# EAGLE board OrmerodController (EAGLE 7.2.0)
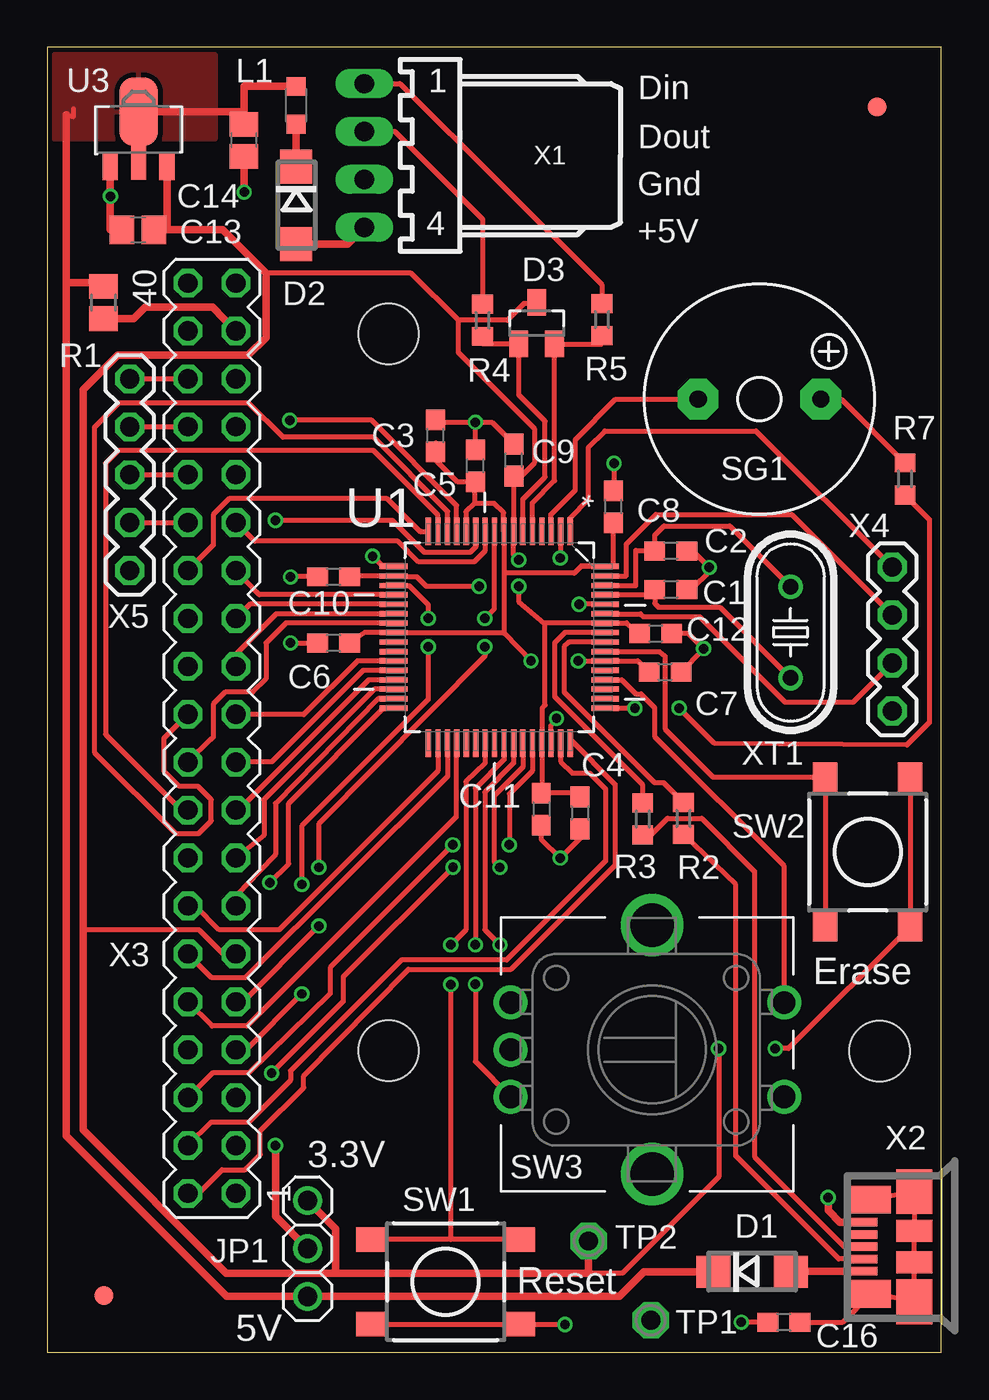
[diagram p0: board, top side]
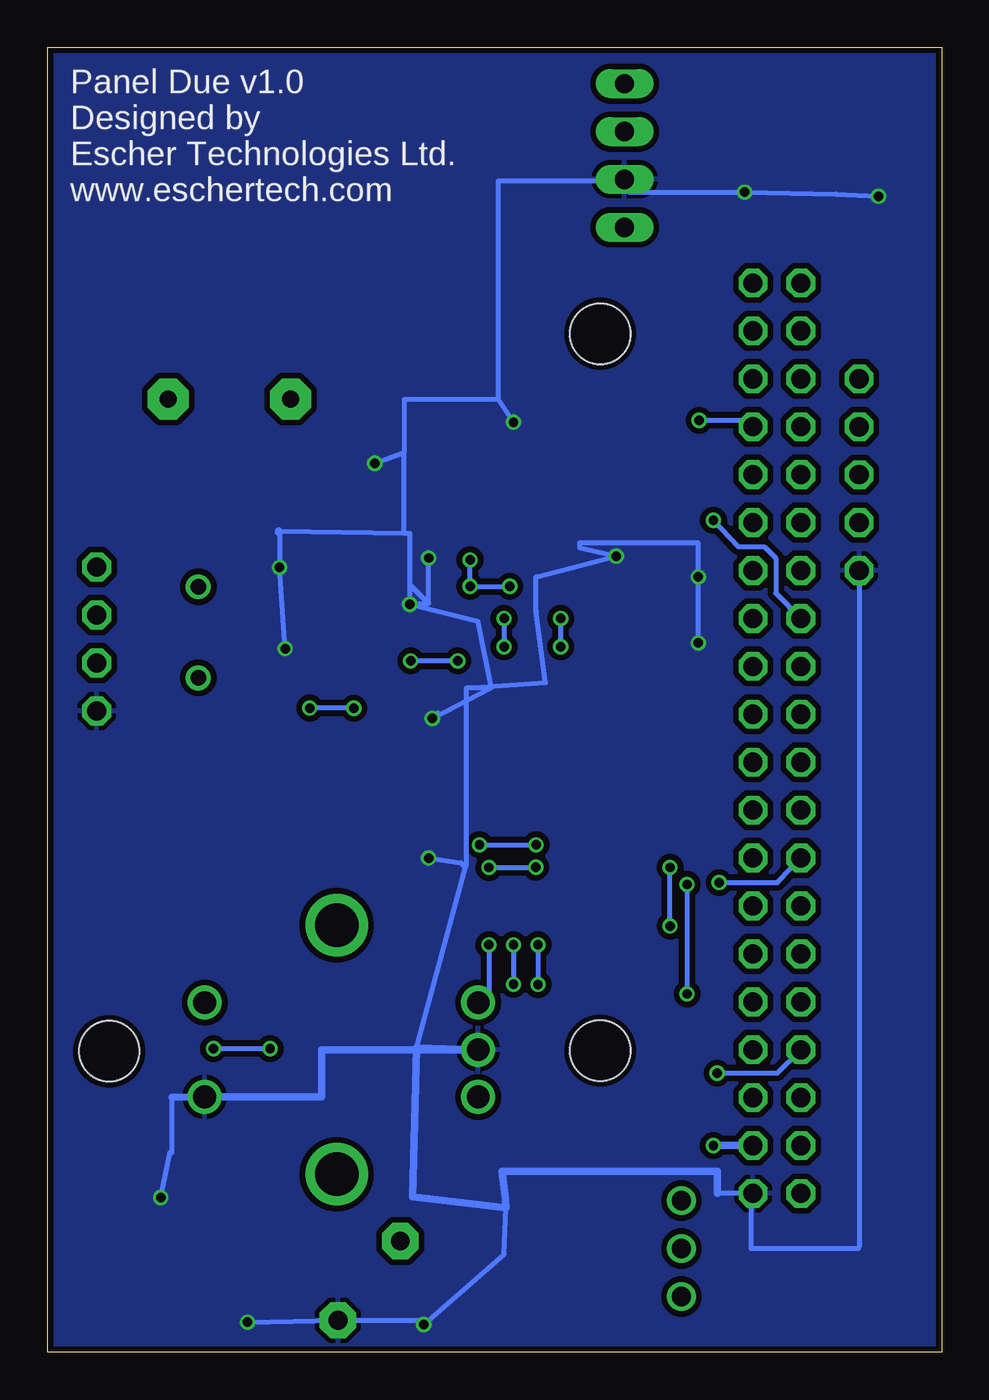
[diagram p1: board, bottom side, seen from below]

Size 47.42 x 69.18 mm. Coordinates in mm from the lower left corner, seen from the top.
Outline: 0,0 47.4,0 47.4,69.18 0,69.18 0,0
Copper layers (1*16): Top 0.035mm / dielectric 1.5mm / Bottom 0.035mm
Design rules "ITEADstudio_DRC": minimum track width 6mil, minimum drill 12mil, track to track 6mil, track to pad 6mil, pad to pad 6mil, via to via 6mil, smd to smd 0mil, copper to edge 10mil, drill to drill 10mil, minimum pad ring 10mil, minimum via ring 6mil, stop-mask expansion 2mil, vias tented up to drill 100mil, thermal gap 10mil
Holes 3.2 mm at 44.13,15.96 18.1,15.99 18.1,53.99

## Footprints (pad centres in the part's own frame; a part is rotated, then mirrored left to right if it is on the bottom)
C0603 = smd 1.1 x 1: 1 -0.85,0; 2 0.85,0
C0805 = smd 1.3 x 1.5: 1 -0.85,0; 2 0.85,0
DO214AC = smd 1.8 x 1.7: A 2.05,0; C -2.05,0
SOT23 = smd 1 x 1.4: 1 -0.95,-1.1; 2 0.95,-1.1; 3 0,1.1
1X03 = drill 1.016: 1 -2.54,0; 2 0,0; 3 2.54,0
L2012C = smd 1 x 1: 1 -1,0; 2 1,0
R0805 = smd 1.3 x 1.5: 1 -0.85,0; 2 0.85,0
R0603 = smd 1 x 1.1: 1 -0.85,0; 2 0.85,0
F/QMX = drill 0.914 pad 2.159 octagon: + 3.251,0; - -3.251,0
DTSM-6 = smd 1.55 x 1.3: 1 -3.975,2.25; 2 3.975,2.25; 3 -3.975,-2.25; 4 3.975,-2.25
PEC12_ENCODER = drill 1.2: A -2.5,-7.5; B 2.5,-7.5; C 0,-7.5; S1 -2.5,7; S2 2.5,7 | drill 2.3: P$6 -6.6,0; P$7 6.6,0
P1-10 = drill 1 pad 1.93 octagon: TP 0,0
QFP50P1200X1200X160-64N = smd 1.473 x 0.279: 1 -5.613,3.759; 2 -5.613,3.251; 3 -5.613,2.743; 4 -5.613,2.261; 5 -5.613,1.753; 6 -5.613,1.245; 7 -5.613,0.762; 8 -5.613,0.254; 9 -5.613,-0.254; 10 -5.613,-0.762; 11 -5.613,-1.245; 12 -5.613,-1.753; 13 -5.613,-2.261; 14 -5.613,-2.743; 15 -5.613,-3.251; 16 -5.613,-3.759; 33 5.613,-3.759; 34 5.613,-3.251; 35 5.613,-2.743; 36 5.613,-2.261; 37 5.613,-1.753; 38 5.613,-1.245; 39 5.613,-0.762; 40 5.613,-0.254; 41 5.613,0.254; 42 5.613,0.762; 43 5.613,1.245; 44 5.613,1.753; 45 5.613,2.261; 46 5.613,2.743; 47 5.613,3.251; 48 5.613,3.759 | smd 0.279 x 1.473: 17 -3.759,-5.613; 18 -3.251,-5.613; 19 -2.743,-5.613; 20 -2.261,-5.613; 21 -1.753,-5.613; 22 -1.245,-5.613; 23 -0.762,-5.613; 24 -0.254,-5.613; 25 0.254,-5.613; 26 0.762,-5.613; 27 1.245,-5.613; 28 1.753,-5.613; 29 2.261,-5.613; 30 2.743,-5.613; 31 3.251,-5.613; 32 3.759,-5.613; 49 3.759,5.613; 50 3.251,5.613; 51 2.743,5.613; 52 2.261,5.613; 53 1.753,5.613; 54 1.245,5.613; 55 0.762,5.613; 56 0.254,5.613; 57 -0.254,5.613; 58 -0.762,5.613; 59 -1.245,5.613; 60 -1.753,5.613; 61 -2.261,5.613; 62 -2.743,5.613; 63 -3.251,5.613; 64 -3.759,5.613
SOT150P400X160-4N = smd 0.8 x 1.4: 1 -1.499,-1.981; 3 1.499,-1.981 | smd 0.8 x 1.9: 2 0,-1.727 | smd 2.032 x 3.65: 4 0,0.94
FIDUCIAL_1MM = smd 1 x 1: 1 0,0
7395-04 = drill 1.016 long: 1 3.81,0; 2 1.27,0; 3 -1.27,0; 4 -3.81,0
MOLEX-47364-0001 = smd 1.7 x 0.45: 1 2.8,1.3; 2 2.8,0.65; 3 2.8,0; 4 2.8,-0.65; 5 2.8,-1.3 | smd 1.9 x 2.375: GND1 0,2.925; GND4 0,-2.925 | smd 2.1 x 1.475: GND2 2.3,2.5; GND3 2.3,-2.5 | smd 1.9 x 1.175: GND5 0,-0.84; GND6 0,0.835
MA20-2 = drill 1.016 octagon: 1 -24.13,-1.27; 2 -24.13,1.27; 3 -21.59,-1.27; 4 -21.59,1.27; 5 -19.05,-1.27; 6 -19.05,1.27; 7 -16.51,-1.27; 8 -16.51,1.27; 9 -13.97,-1.27; 10 -13.97,1.27; 11 -11.43,-1.27; 12 -11.43,1.27; 13 -8.89,-1.27; 14 -8.89,1.27; 15 -6.35,-1.27; 16 -6.35,1.27; 17 -3.81,-1.27; 18 -3.81,1.27; 19 -1.27,-1.27; 20 -1.27,1.27; 21 1.27,-1.27; 22 1.27,1.27; 23 3.81,-1.27; 24 3.81,1.27; 25 6.35,-1.27; 26 6.35,1.27; 27 8.89,-1.27; 28 8.89,1.27; 29 11.43,-1.27; 30 11.43,1.27; 31 13.97,-1.27; 32 13.97,1.27; 33 16.51,-1.27; 34 16.51,1.27; 35 19.05,-1.27; 36 19.05,1.27; 37 21.59,-1.27; 38 21.59,1.27; 39 24.13,-1.27; 40 24.13,1.27
1X04 = drill 1.016 octagon: 1 0,0; 2 2.54,0; 3 5.08,0; 4 7.62,0
1X05 = drill 1.016 octagon: 1 0,0; 2 2.54,0; 3 5.08,0; 4 7.62,0; 5 10.16,0
HC49U-V = drill 0.813: 1 -2.413,0; 2 2.413,0

## Placement (x,y rotation side)
C1  18p  [C0603]  33.06,40.44 0 top
C2  18p  [C0603]  33.06,42.48 0 top
C3  2u2  [C0603]  20.59,48.58 90 top
C4  2u2  [C0603]  28.24,28.59 270 top
C5  100n  [C0603]  22.7,46.99 90 top
C6  100n  [C0603]  15.18,37.6 180 top
C7  100n  [C0603]  32.76,36.06 0 top
C8  100n  [C0603]  30.02,44.82 90 top
C9  100n  [C0603]  24.74,47.29 90 top
C10  100n  [C0603]  15.18,41.11 180 top
C11  100n  [C0603]  26.19,28.79 270 top
C12  100n  [C0603]  32.26,38.1 0 top
C13  10u  [C0805]  4.82,59.5 0 top
C14  10u  [C0805]  10.44,64.25 90 top
C16  10n  [C0603]  39.05,1.6 180 top
D1  SS13  [DO214AC]  37.38,4.26 0 top
D2  SS13  [DO214AC]  13.2,60.8 270 top
D3  BAT54C  [SOT23]  25.95,54.55 0 top
JP1  Display voltage  [1X03]  13.8,5.5 90 top
L1  1u  [L2012C]  13.2,66.1 270 top
R1  22R  [R0805]  2.99,55.64 90 top
R2  22R  [R0603]  33.73,28.3 90 top
R3  22R  [R0603]  31.57,28.27 90 top
R4  2K2  [R0603]  23.08,54.7 270 top
R5  2K2  [R0603]  29.41,54.74 270 top
R7  470R  [R0603]  45.48,46.3 270 top
SG1  F/QMX  [F/QMX]  37.76,50.52 0 top
SW1  DTSM-6  [DTSM-6]  21.12,3.74 180 top
SW2  DTSM-6  [DTSM-6]  43.5,26.52 90 top
SW3  PEC12_ENCODER  [PEC12_ENCODER]  32.07,16.04 270 top
TP1  TPPAD1-10  [P1-10]  32,1.7 0 top
TP2  TPPAD1-10  [P1-10]  28.7,5.9 0 top
U1  ATSAM3S2BA-AU  [QFP50P1200X1200X160-64N]  23.97,37.9 270 top
U3  MCP1700T-3302E/MB  [SOT150P400X160-4N]  4.85,64.82 0 top
U$1  FIDUCIAL  [FIDUCIAL_1MM]  44,66 0 top
U$2  FIDUCIAL  [FIDUCIAL_1MM]  3,3 0 top
X1  22-05-7048-04  [7395-04]  16.81,63.44 90 top
X2  MOLEX-47346-0001  [MOLEX-47364-0001]  45.97,5.6 180 top
X3  TFT  [MA20-2]  8.73,32.55 90 top
X4  Expansion  [1X04]  44.8,34 90 top
X5  SD  [1X05]  4.38,41.44 90 top
XT1  8MHz  [HC49U-V]  39.41,38.16 90 top

## Library data of the parts
C1-C14 C16 L1 R1-R5 R7 = resistor
D1-D3 = diode
JP1 U$1 U$2 = adafruit
SG1 = buzzer; OC_FARNELL: unknown; OC_NEWARK: unknown
SW1 SW2 = switch-tact
SW3 = carrilib
TP1 TP2 = testpad
U1 = Atmel_By_element14_Batch_1-00; DESCRIPTION: Flash MCU; MPN: ATSAM3S2BA-AU; OC_FARNELL: 1841653; OC_NEWARK: 12T1311; PACKAGE: QFP-64; SUPPLIER: Atmel
U3 = Microchip-MCP170xxxx_MB; MPN: MCP1702T-3302E/MB; OC_FARNELL: 1605558; OC_NEWARK: 11N7989; PACKAGE: SOT89-3; SUPPLIER: Microchip
X1 = con-molex; OC_FARNELL: unknown; OC_NEWARK: unknown
X2 = usb_con-update
X3 = con-lstb; OC_FARNELL: unknown; OC_NEWARK: unknown
X4 X5 = SparkFun-Connectors
XT1 = crystal; OC_FARNELL: 1666969; OC_NEWARK: unknown

## Nets
GND: C1.2 C2.2 C3.2 C4.2 C5.2 C6.2 C7.2 C8.2 C9.2 C10.2 C11.2 C12.2 C13.1 C14.1 C16.2 SW1.1 SW1.2 SW3.C SW3.S2 TP1.TP U1.2 U1.17 U1.46 U1.60 U3.1 X1.3 X2.5 X3.1 X4.1 X5.1
N$1: U1.48 X3.2
N$2: U1.15 X3.18
N$3: U1.47 X3.4
N$4: U1.44 X3.6
N$5: U1.36 X3.10
N$6: U1.34 X3.14
N$7: U1.35 X3.12
N$8: U1.32 X3.16
N$9: U1.31 X3.13
N$10: U1.43 X3.8
N$11: U1.30 X3.15
N$12: U1.29 X3.17
N$13: U1.28 X3.19
N$14: U1.27 X3.21
N$15: U1.22 X3.23
N$16: U1.21 X3.25
N$17: U1.20 X3.27
N$18: R2.2 U1.56
N$19: U1.14 X3.22
N$20: U1.11 X3.26
N$21: C1.1 U1.61 XT1.1
N$22: C2.1 U1.62 XT1.2
N$23: SW2.1 SW2.2 U1.55
N$24: SW3.B U1.41
N$25: SW1.3 SW1.4 U1.39
N$26: D3.2 R5.2 U1.5
N$27: D3.1 R4.2 U1.6
N$28: R3.2 U1.57
N$29: R4.1 X1.2
N$30: R5.1 X1.1
N$31: D1.A X2.1
N$32: R2.1 X2.2
N$33: SG1.- U1.3
N$34: R3.1 X2.3
N$35: U1.23 X3.20
N$36: U1.16 X3.28
N$37: JP1.2 X3.3
N$38: R1.1 X3.37
N$39: X3.36 X5.5
N$40: U1.63 X4.3
N$41: SW3.A U1.42
N$42: SW3.S1 U1.52
N$43: U1.13 X3.33
N$44: U1.10 X3.29
N$45: U1.9 X3.9
N$46: D2.C L1.2
N$47: C16.1 X2.GND1 X2.GND2 X2.GND3 X2.GND4 X2.GND5 X2.GND6
N$48: U1.19 X3.7
N$49: U1.59 X4.2
N$50: D2.A X1.4
N$51: X3.34 X5.4
N$52: R7.1 SG1.+
N$53: U1.1 X4.4
N$54: R7.2 U1.49
N$55: C3.1 C5.1 C6.1 C7.1 C8.1 U1.8 U1.12 U1.24 U1.54 U1.64
N$56: X3.32 X5.3
N$57: X3.30 X5.2
VCC: C4.1 C9.1 C10.1 C11.1 C12.1 C13.2 D3.3 JP1.3 SW2.3 SW2.4 TP2.TP U1.7 U1.18 U1.45 U1.58 U3.3 X3.11
VCC5: C14.2 D1.C JP1.1 L1.1 R1.2 U3.2 U3.4

## Tracks (layer width: path | path; a pad name or v marks a point on that pad's centre or on a via)
GND  (via drill 0.5, 0.5 pad 0.25)
  Top 0.254: U1.2 27.2,43.51 v27.2,42.1 | 18.9,41.65 18.9,41.7 18.4,41.7 | U1.46 26.7,33.2 v27,33.6 | C1.2 34.21,40.5 35.1,41.39 v35.1,41.6 34.22,42.48 C2.2 | U1.60 v28.2,39.65 | C5.2 v22.7,49.3 | C9.2 24.7,47.74 | C10.2 13.09,41.11 v12.9,41.1 | v12.9,37.6 C6.2 | 18.4,41.7 U1.17 | C11.2 26.19,27.2 v27.2,26.2 28.24,27.24 C4.2 | C9.2 24.66,48.14 | v22.7,49.3 23.58,49.3 C9.2 | 18.4,41.7 17.75,41.7 v17.25,42.2 | v3.35,61.27 3.35,61.4 | C13.1 3.35,59.5 | 10.45,63.2 C14.1 | SW1.2 SW1.1 v27.45,1.49 v27.45,1.48 | C16.2 v36.8,1.6 | v30.05,47.12 30.05,45.97 C8.2 | C3.2 20.59,49.3 v22.7,49.3 | C12.2 34,38.1 v34.8,37.3 34.8,37.25 C7.2 | 10.1,8.42 X3.1
  Top 0.406: 3.35,61.4 U3.1 | 3.35,59.5 v3.35,61.27 | v10.45,61.5 10.45,63.2 | X2.5 42.02,6.9 41.4,7.52 v41.4,8.2
  Bottom 0.254: X3.1 11.9,8.42 | 23.9,35.2 25.2,35.2 | 25.2,35.2 21,35.5 21.5,39.3 21.5,41.1 v17.25,42.2 19.2,42.65 19.2,42.9 12.9,42.9 v12.9,41.1 v12.9,37.6 | 28.2,40.7 28.2,39.7 | 28.2,39.7 v28.2,39.65 24.6,38.75 23.9,35.2 | 28.2,39.7 27.2,39.7 | 26.7,33.9 v27,33.6 23.9,35.2 | v34.8,37.3 v35.1,41.6 35.1,43.5 | 28.5,43.4 35.1,43.5 | 35.1,43.6 35.2,43.6 35.2,43.4 35.1,43.5 | v30.05,47.12 28.5,47.7 | v22.7,49.3 23.5,50.5 | 23.5,50.5 28.5,50.5 28.5,47.7 | 28.5,43.4 28.2,43.4 28.2,40.7 | 28.5,43.4 28.5,47.7 | v27.2,26.2 25.48,25.95 | 25.48,25.95 25.2,25.8 25.2,35.2 | 23.5,50.5 23.5,62.1 16.88,62.1 X1.3 16.58,62.1 16.58,61.5 v10.45,61.5 5.6,61.4 v3.35,61.27 | 27.84,16.14 25.24,25.7 25.48,25.95 | 28.2,40.7 27.2,39.7 | 27.2,39.7 v27.2,42.1 | 23.1,7.67 23.2,5.2 v27.45,1.48 27.45,1.7 TP1.TP v36.8,1.6 | X5.1 4.38,5.6 4.5,5.5 | 4.4,5.5 4.5,5.5 | 4.5,5.5 10.1,5.5 10.1,8.42 | v41.4,8.2 40.9,10.6 40.81,10.6 40.81,13.52
  Bottom 0.406: 11.9,8.42 11.9,9.6 23.3,9.6 23.13,8.14 23.1,7.67 28.04,8.24 27.84,16.14 SW3.C 32.86,16.04 32.86,13.54 SW3.S2 40.81,13.52
  pour Bottom (isolate 0.305): 0.4,68.8 47.1,68.8 47.2,0.3 0.3,0.3
N$1
  Top 0.254: U1.48 27.73,32.47 30.1,30.1 30.1,25.8 24.6,20.3 19.15,20.3 13.6,14.65 13.6,14.03 11.3,11.73 11.3,10.47 10.5,9.68 9.28,9.68 8.02,8.42 X3.2
N$2
  Top 0.254: U1.15 20.72,44.38 17.3,47.8 3.77,47.8 3.1,47.13 3.1,32.75 7.11,28.74 X3.18
N$3
  Top 0.254: U1.47 27.22,31.32 27.84,30.7 28.75,30.7 29.6,29.85 29.6,26.04 24.36,20.8 18.78,20.8 12.9,14.92 12.9,14.42 10.68,12.2 8.7,12.2 X3.4
N$4  (via drill 0.5)
  Top 0.254: U1.44 25.72,30.82 24.5,29.6 v24.5,26.9 | v21.5,26.9 15,20.4 15,19 10.7,14.8 8.76,14.8 X3.6
  Bottom 0.254: v24.5,26.9 v21.5,26.9
N$5
  Top 0.254: X3.10 8.74,17.3 10.6,17.3 21.7,28.4 21.7,32.28 U1.36
N$6
  Top 0.254: U1.34 20.72,30.82 12.3,22.4 9.12,22.4 7.86,23.66 X3.14
N$7
  Top 0.254: U1.35 21.23,30.53 10.5,19.85 8.72,19.85 X3.12
N$8  (via drill 0.5)
  Top 0.254: U1.32 17.84,34.14 12.8,29.1 12.8,25.9 v11.8,24.9
  Bottom 0.254: v11.8,24.9 8.7,24.9 8,25.66 X3.16
N$9
  Top 0.254: U1.31 17.55,34.65 12.1,29.1 12.1,26.4 11.24,25.5 10.1,24.3 10,24.2 X3.13
N$10  (via drill 0.5)
  Top 0.254: U1.43 25.21,31.02 23.7,29.5 23.7,26 v24,25.7 | v21.52,25.71 15.7,19.9 15.7,18.6 v11.9,14.8
  Bottom 0.254: v24,25.7 v21.52,25.71 | v11.9,14.8 8.7,14.8 X3.8
N$11
  Top 0.254: U1.30 17.36,35.16 11.5,29.3 11.5,27.4 X3.15
N$12
  Top 0.254: U1.29 17.04,35.64 10.14,28.74 X3.17
N$13
  Top 0.254: U1.28 16.75,36.15 11.9,31.3 10.02,31.3 X3.19
N$14
  Top 0.254: U1.27 16.45,36.66 13.6,33.8 10.02,33.8 X3.21
N$15
  Top 0.254: U1.22 12.14,39.15 10,37 X3.23
N$16
  Top 0.254: U1.21 10.75,39.65 X3.25
N$17
  Top 0.254: U1.20 11.24,40.16 11.1,40.3 10.2,41.24 X3.27
N$18
  Top 0.254: U1.56 27.65,37.65 27.6,37.6 | 27.65,37.65 27.6,37.6 | 27.6,37.6 27.4,37.4 27.4,35 32.2,30.2 32.68,30.2 R2.2
N$19
  Top 0.254: U1.14 21.23,44.57 17.3,48.5 12.5,48.5 10.68,50.33 3.8,50.33 2.5,49.02 2.5,31.81 6.81,27.5 8.03,27.5 8.7,28.17 8.7,29.29 7.99,30 7,30 6.2,30.8 6.2,32.56 X3.22
N$20  (via drill 0.5)
  Top 0.254: U1.11 22.73,42.7 22.42,42.4 20,42.4 18.3,44.1 v12.1,44.1
  Bottom 0.254: v12.1,44.1 10.8,42.7 9.4,42.7 8.8,42.1 8.8,40.24 X3.26
N$21
  Top 0.254: U1.61 31.91,40.16 C1.1 32.21,39.69 32.4,39.5 35.66,39.5 XT1.1
N$22
  Top 0.254: U1.62 31.2,40.64 31.2,42.5 31.91,42.5 C2.1 32.21,43.31 32.7,43.8 36.19,43.8 XT1.2
N$23
  Top 0.254: U1.55 32.46,37.14 32.75,36.9 32.75,33.04 | SW2.1 SW2.2 35.3,30.5 32.75,33.04 | 32.75,33.04 32.76,33.04
N$24  (via drill 0.5)
  Top 0.254: U1.41 24.22,31.42 22.7,29.9 v22.7,21.6 | v22.7,19.51 22.7,15.41 SW3.B
  Bottom 0.254: v22.7,21.6 v22.7,19.51
N$25  (via drill 0.5)
  Top 0.254: U1.39 23.21,31.21 22.2,30.25 22.2,22.39 v21.4,21.6 | SW1.4 SW1.3 21.4,5.99 v21.4,19.5
  Bottom 0.254: v21.4,21.6 v21.4,19.5
N$26
  Top 0.254: U1.5 25.72,45.02 26.9,46.2 D3.2 29.41,53.45 R5.2
N$27
  Top 0.254: U1.6 25.21,45.22 26.4,46.4 26.4,49.35 25,50.75 D3.1 23.08,53.45 R4.2
N$28
  Top 0.254: U1.57 27.45,38.15 26.9,37.6 26.9,34.75 31.55,30.1 31.55,29.14 R3.2
N$29
  Top 0.254: X1.2 18.44,64.7 23.1,60.04 23.1,55.55 R4.1
N$30
  Top 0.254: X1.1 18.7,67.25 29.41,56.59 R5.1
N$31
  Top 0.254: X2.1 43.17,4.26 | 40.1,4.3 40.1,4.26 D1.A
  Top 0.406: X2.1 40.1,4.3
N$32
  Top 0.254: X2.2 41.97,4.95 36.5,10.41 36.5,24.8 R2.1
N$33
  Top 0.254: U1.3 26.7,44.41 26.71,44.41 28,45.7 28,48.38 30.14,50.52 SG1.-
N$34
  Top 0.254: X2.3 42.26,5.6 37.5,10.36 37.5,25.5 34.7,28.3 32.89,28.3 32.01,27.42 R3.1
N$35
  Top 0.254: U1.23 12.66,38.66 11.6,37.6 11.6,35.7 10.9,35 9.44,35 8.8,34.36 8.8,32.6 8.7,32.5 8.68,32.5 X3.20
N$36
  Top 0.254: X3.28 8.8,42.78 8.8,44.39 9.66,45.25 18.02,45.25 19.76,43.51 U1.16 19.84,43.51
N$37  (via drill 0.5)
  Top 0.406: v12.1,10.96 12.1,7.2 JP1.2
  Bottom 0.406: X3.3 v12.1,10.96
N$38
  Top 0.254: 2.99,54.42 R1.1
  Top 0.406: X3.37 8.76,55.4 5.2,55.4 4.6,54.8 R1.1
N$39
  Top 0.254: X5.5 X3.36
N$40
  Top 0.254: U1.63 30.7,41.15 30.7,42.84 32.27,44.41 39.47,44.41 X4.3
N$41  (via drill 0.5)
  Top 0.254: U1.42 24.73,31.23 23.2,29.7 23.2,22.4 v24,21.6
  Bottom 0.254: v24,21.6 24,19.01 SW3.A
N$42
  Top 0.254: U1.52 30.46,35.64 31.2,34.9 31.48,34.9 32.2,34.18 32.2,32.65 39.05,25.8 39.05,18.56 SW3.S1
N$43  (via drill 0.5)
  Top 0.254: U1.13 21.71,44.89 17.2,49.4 v12.86,49.4
  Bottom 0.254: v12.86,49.4 10.4,49.4 10.04,49.06 X3.33
N$44
  Top 0.254: U1.10 23.21,42.47 22.64,41.9 19.7,41.9 18.6,43 11,43 10,44 9.98,44 X3.29
N$45  (via drill 0.5)
  Top 0.254: v23.2,37.4 23.2,36.9 14.4,28 v14.4,25.7 | X3.9 10.38,18.58 v14.4,22.6 | U1.9 23.7,43.51 23.7,39.4 v23.2,38.9
  Bottom 0.254: v23.2,38.9 v23.2,37.4 | v14.4,22.6 v14.4,25.7
N$46
  Top 0.406: D2.C L1.2
N$47
  Top 0.254: X2.GND3 46.17,8.53 X2.GND4 X2.GND5 X2.GND6 X2.GND1 46.17,2.67 X2.GND2 42.17,1.6 C16.1
N$48  (via drill 0.5)
  Top 0.254: U1.19 19.19,40.64 20.2,39.63 v20.2,38.9 | v20.2,37.4 20.2,34.6 13.5,27.9 v13.5,24.8 | v13.5,19 10.54,16.04 X3.7
  Bottom 0.254: v20.2,38.9 v20.2,37.4 | v13.5,24.8 v13.5,19
N$49
  Top 0.254: U1.59 31.45,39.15 31.6,39 34.58,39 36,37.58 39.13,34.45 42.71,34.45 X4.2
N$50
  Top 0.406: D2.A 15.93,58.75 X1.4
N$51
  Top 0.254: X5.4 X3.34
N$52
  Top 0.254: SG1.+ 42.1,50.52 R7.1
N$53
  Top 0.254: U1.1 27.73,44.23 28.7,45.2 28.7,47.98 29.56,48.84 37.58,48.84 X4.4
N$54  (via drill 0.5)
  Top 0.254: U1.49 v31.16,34.14 | 45.5,45.45 R7.2 46.77,44.15 46.77,33.37 45.58,32.19 35.37,32.28 v33.5,34.15
  Bottom 0.254: v31.16,34.14 v33.5,34.15
N$55  (via drill 0.5)
  Top 0.254: U1.64 30.02,41.66 C8.1 | 22.65,45 22.2,44.55 22.2,43.51 U1.12 | C7.1 31.32,36.66 U1.54 v28.15,36.65 | C6.1 16.83,38.15 U1.24 24.22,38.15 | U1.64 29.58,41.7 28.3,41.7 28.3,41.66 | U1.64 28.3,41.66 | 28.3,41.66 27.94,41.3 24.22,41.3 | v25.65,36.65 24.25,38.1 24.22,38.13 24.22,38.15 | 22.65,45 23.7,45 24.2,44.5 24.2,43.51 U1.8 24.22,41.3 | C5.1 22.65,46.14 | 22.65,46.14 22.65,45 | 22.65,46.14 21.76,46.14 20.6,47.3 20.6,48.22 C3.1 | 24.22,41.3 24.22,38.15
  Bottom 0.254: v25.65,36.65 v28.15,36.65
N$56
  Top 0.254: X5.3 X3.32
N$57
  Top 0.254: X5.2 X3.30
VCC  (via drill 0.5)
  Top 0.254: C12.1 30.71,38.66 U1.58 26.4,38.66 | C10.1 16.03,41.15 U1.18 18.41,41.1 19.6,41.1 20.1,40.6 v22.9,40.6 | 26.4,38.66 26.34,38.66 25,39.8 v25,40.6 | 21.8,54.7 21.8,52.99 25.86,48.93 25.86,47.16 25.14,46.44 C9.1 U1.7 24.7,43.51 24.7,42.3 v25,42 | 11.6,57.2 19.3,57.2 21.8,54.7 | C4.1 28.34,29.46 28.16,29.64 C11.1 26.23,29.58 U1.45 26.25,32.29 26.25,34.15 26.4,34.3 26.4,38.66 | v35.6,16.1 35.6,9.3 30.5,4.2 28.7,4.2 | 38.72,16.1 v38.6,16.1 39.3,16.1 SW2.3 SW2.4 | 21.8,54.7 24.4,54.7 25.3,55.6 25.95,55.6 D3.3 | 1.9,22.4 8.06,22.4 9.34,21.12 X3.11 | 6.35,59.5 C13.2
  Top 0.406: 15.3,4.2 28.7,4.2 TP2.TP | 15.3,4.2 9.5,4.2 1.9,11.8 1.9,22.4 1.9,51.02 3.73,52.85 10.64,52.86 11.6,53.79 11.6,57.2 9.3,59.5 C13.2 | U3.3 6.35,59.5 | JP1.3 15.3,6.54 15.3,4.2
  Bottom 0.254: v22.9,40.6 v25,40.6 v25,42 | v38.6,16.1 v35.6,16.1
VCC5
  Top 0.254: 10.45,65.76 C14.2 | 4.85,67.1 U3.4 U3.2 | 1.4,65.9 1.4,65.5 1,65.6 | R1.2 2.99,56.7
  Top 0.406: L1.1 10.45,67.1 10.45,65.76 U3.4 | D1.C 31.64,4.26 30.33,2.96 JP1.1 9.52,2.96 1,11.48 1,56.7 | 1,56.7 1,65.6 | 2.99,56.7 1,56.7
  pour Top: 0.4,68.8 8.9,68.8 8.9,64.3 0.4,64.3

## Text on the board
tNames: Din | Dout | Gnd | +5V | Erase | 3.3V | Reset | 5V
bNames: Panel Due v1.0 / Designed by / Escher Technologies Ltd. / www.eschertech.com